# Altium PCB ADD.PcbDoc (part 3 of 3)
Units mm, origin at the board's own origin, x right, y up, seen from the top; angles counter-clockwise.
Board outline 193.67 x 275.84 mm, 2 copper layers (Top Layer, Bottom Layer); 216 components, 0 nets, 1200 pads, 0 vias.
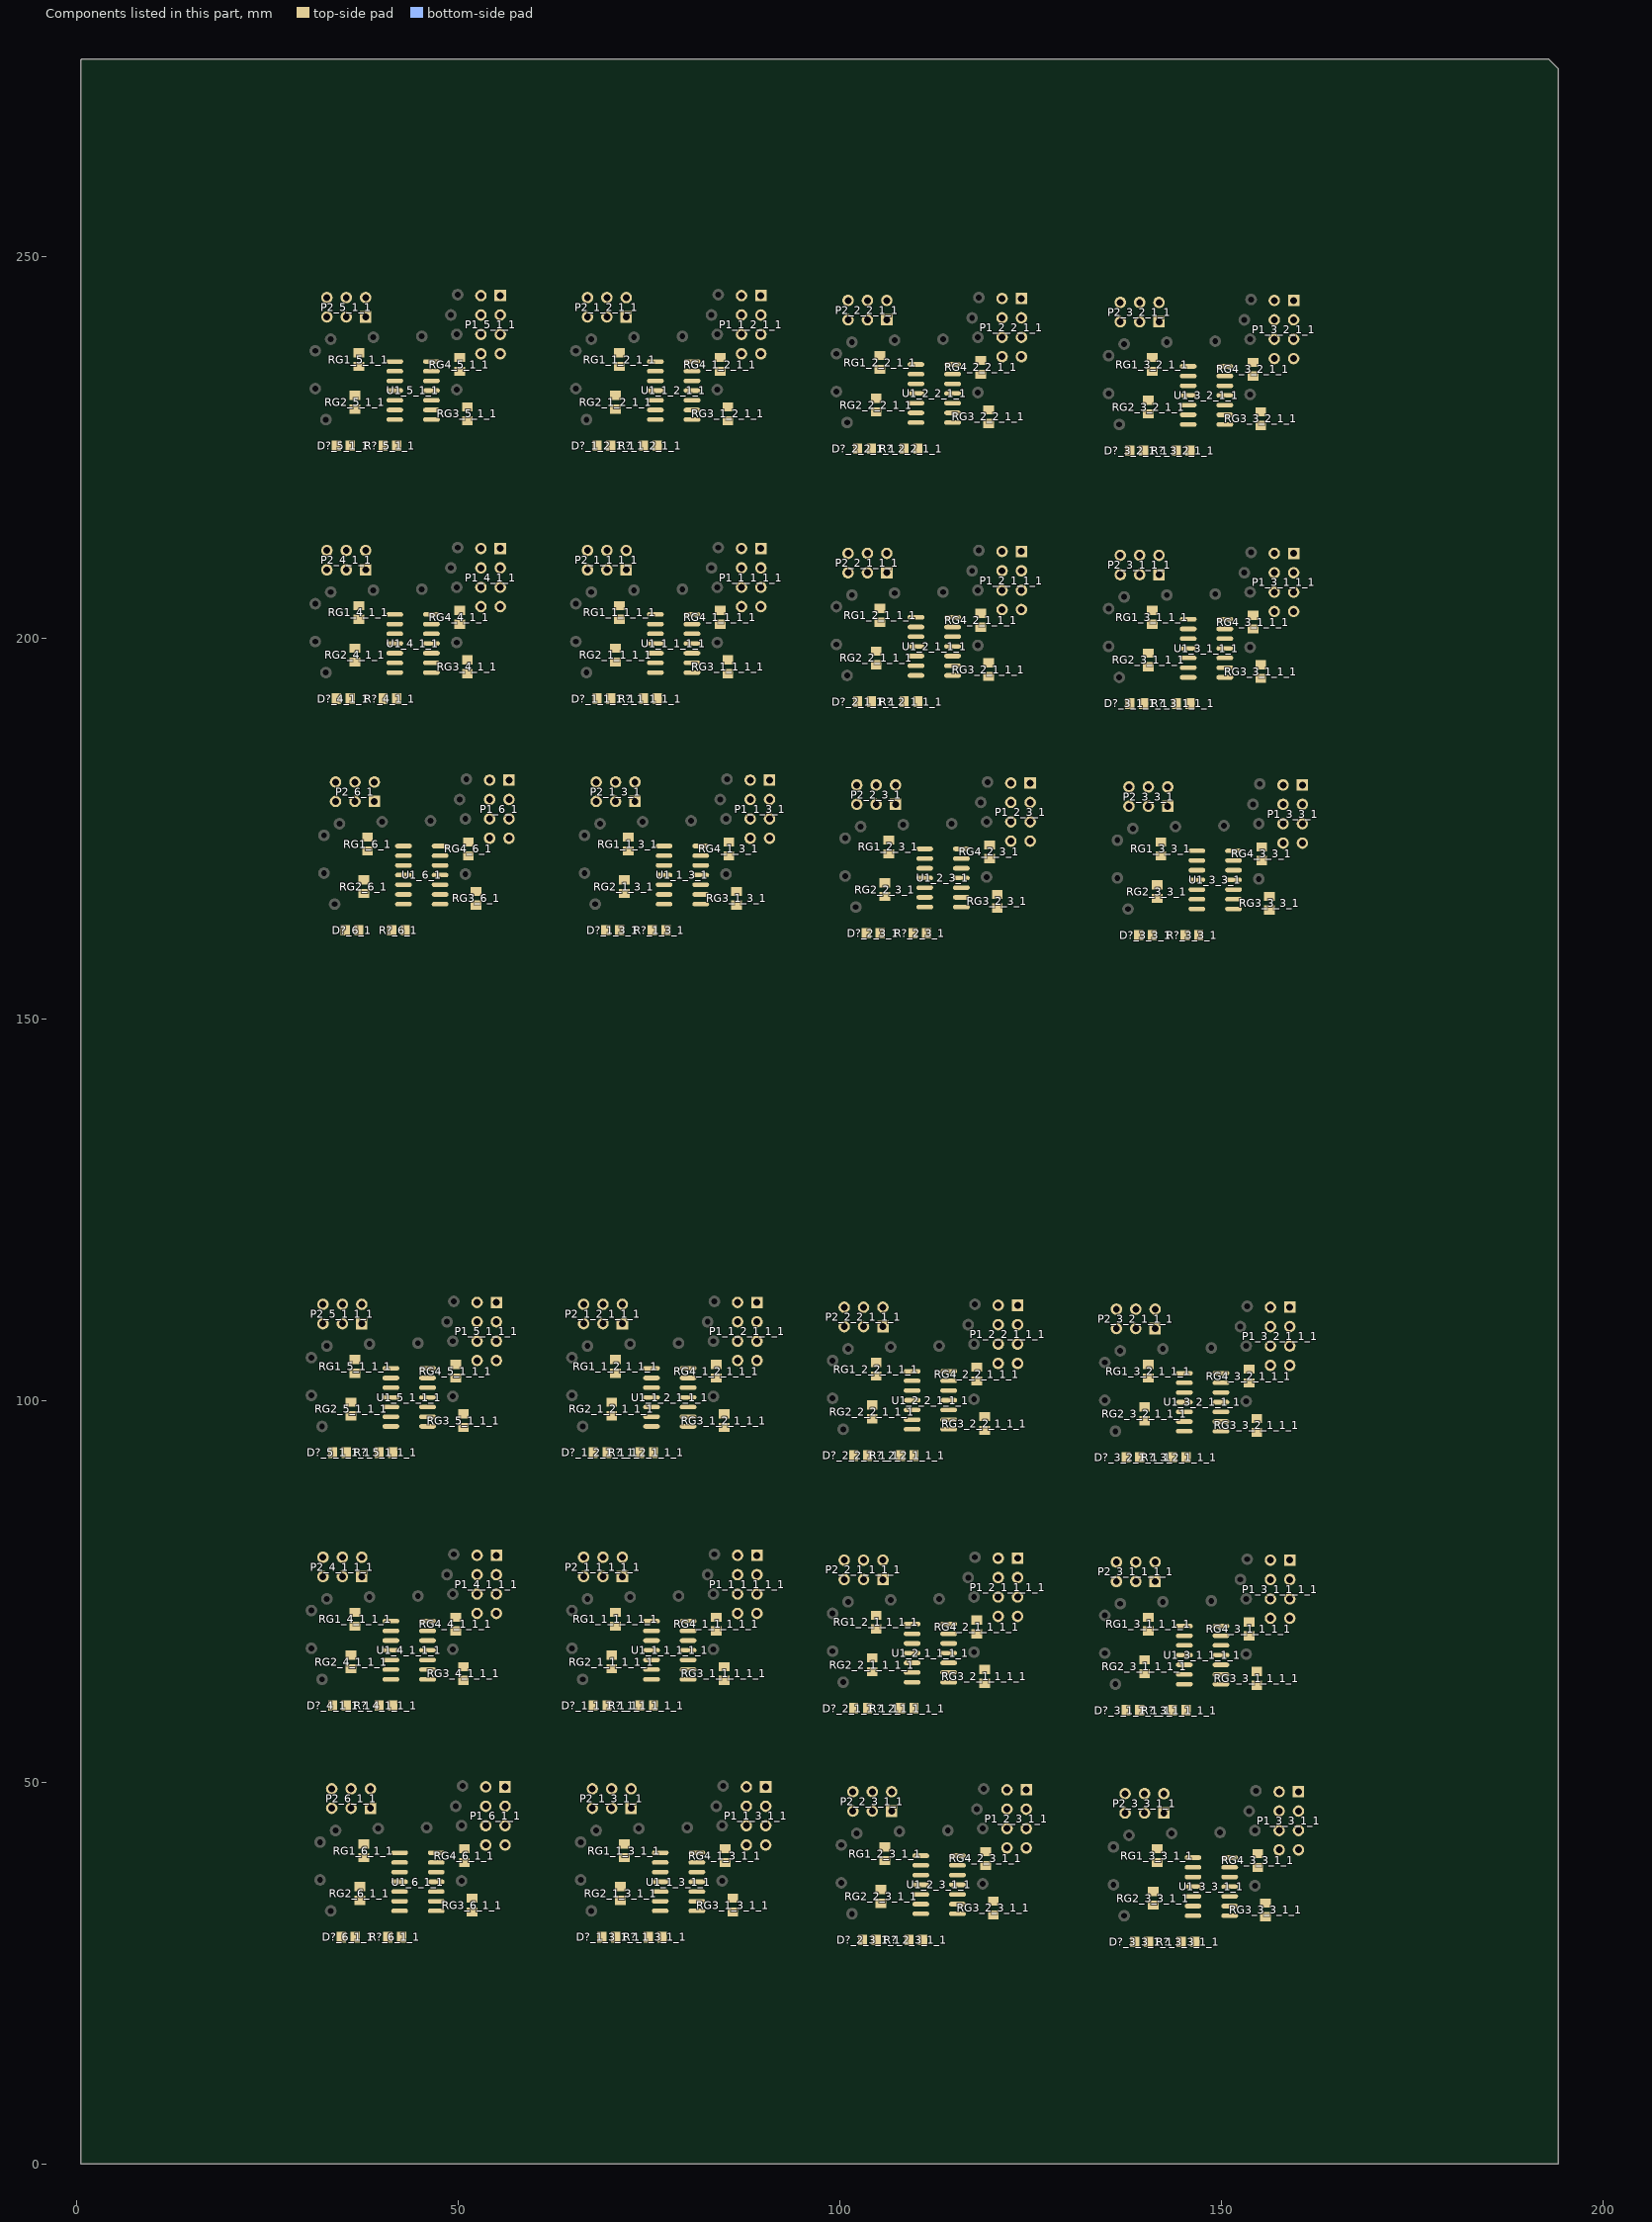
[diagram p3: the components of this part, seen from the top]

## Keep-outs
Keep-Out Layer:
  lines w0.254: 26.911,57.15 26.911,81.788 57.01,81.788 57.01,57.15 26.911,57.15 ; 26.911,90.297 26.911,114.935 57.01,114.935 57.01,90.297 26.911,90.297 ; 27.419,189.103 27.419,213.741 57.518,213.741 57.518,189.103 27.419,189.103 ; 27.419,222.25 27.419,246.888 57.518,246.888 57.518,222.25 27.419,222.25 ; 28.054,26.797 58.153,26.797 58.153,51.435 28.054,51.435 28.054,26.797 ; 28.562,158.75 58.661,158.75 58.661,183.388 28.562,183.388 28.562,158.75 ; 61.074,57.15 61.074,81.788 91.173,81.788 91.173,57.15 61.074,57.15 ; 61.074,90.297 61.074,114.935 91.173,114.935 91.173,90.297 61.074,90.297 ; 61.582,189.103 61.582,213.741 91.681,213.741 91.681,189.103 61.582,189.103 ; 61.582,222.25 61.582,246.888 91.681,246.888 91.681,222.25 61.582,222.25 ; 62.217,26.797 92.316,26.797 92.316,51.435 62.217,51.435 62.217,26.797 ; 62.725,158.75 92.824,158.75 92.824,183.388 62.725,183.388 62.725,158.75 ; 95.237,56.769 95.237,81.407 125.336,81.407 125.336,56.769 95.237,56.769 ; 95.237,89.916 95.237,114.554 125.336,114.554 125.336,89.916 95.237,89.916 ; 95.745,188.722 95.745,213.36 125.844,213.36 125.844,188.722 95.745,188.722 ; 95.745,221.869 95.745,246.507 125.844,246.507 125.844,221.869 95.745,221.869 ; 96.38,26.416 126.479,26.416 126.479,51.054 96.38,51.054 96.38,26.416 ; 96.888,158.369 126.987,158.369 126.987,183.007 96.888,183.007 96.888,158.369 ; 130.924,56.515 130.924,81.153 161.023,81.153 161.023,56.515 130.924,56.515 ; 130.924,89.662 130.924,114.3 161.023,114.3 161.023,89.662 130.924,89.662 ; 131.432,188.468 131.432,213.106 161.531,213.106 161.531,188.468 131.432,188.468 ; 131.432,221.615 131.432,246.253 161.531,246.253 161.531,221.615 131.432,221.615 ; 132.067,26.162 162.166,26.162 162.166,50.8 132.067,50.8 132.067,26.162 ; 132.575,158.115 162.674,158.115 162.674,182.753 132.575,182.753 132.575,158.115

## Other copper
Bottom Layer:
  text "ROBOT" at 44.31,235.458 h1.52
  text "ROBOT" at 78.473,235.458 h1.52
  text "ROBOT" at 112.636,235.077 h1.52
  text "ROBOT" at 148.323,234.823 h1.52
  text "Presure" at 45.707,232.791 h1.52
  text "Presure" at 79.87,232.791 h1.52
  text "Presure" at 114.033,232.41 h1.52
  text "Presure" at 149.72,232.156 h1.52
  text "collection" at 46.596,230.251 h1.52
  text "collection" at 80.759,230.251 h1.52
  text "collection" at 114.922,229.87 h1.52
  text "collection" at 150.609,229.616 h1.52
  text "2017.9.10" at 56.629,223.012 h1.52
  text "2017.9.10" at 90.792,223.012 h1.52
  text "2017.9.10" at 124.955,222.631 h1.52
  text "2017.9.10" at 160.642,222.377 h1.52
  text "ROBOT" at 44.31,202.311 h1.52
  text "ROBOT" at 78.473,202.311 h1.52
  text "ROBOT" at 112.636,201.93 h1.52
  text "ROBOT" at 148.323,201.676 h1.52
  text "Presure" at 45.707,199.644 h1.52
  text "Presure" at 79.87,199.644 h1.52
  text "Presure" at 114.033,199.263 h1.52
  text "Presure" at 149.72,199.009 h1.52
  text "collection" at 46.596,197.104 h1.52
  text "collection" at 80.759,197.104 h1.52
  text "collection" at 114.922,196.723 h1.52
  text "collection" at 150.609,196.469 h1.52
  text "2017.9.10" at 56.629,189.865 h1.52
  text "2017.9.10" at 90.792,189.865 h1.52
  text "2017.9.10" at 124.955,189.484 h1.52
  text "2017.9.10" at 160.642,189.23 h1.52
  text "ROBOT" at 45.453,171.958 h1.52
  text "ROBOT" at 79.616,171.958 h1.52
  text "ROBOT" at 113.779,171.577 h1.52
  text "ROBOT" at 149.466,171.323 h1.52
  text "Presure" at 46.85,169.291 h1.52
  text "Presure" at 81.013,169.291 h1.52
  text "Presure" at 115.176,168.91 h1.52
  text "Presure" at 150.863,168.656 h1.52
  text "collection" at 47.739,166.751 h1.52
  text "collection" at 81.902,166.751 h1.52
  text "collection" at 116.065,166.37 h1.52
  text "collection" at 151.752,166.116 h1.52
  text "2017.9.10" at 57.772,159.512 h1.52
  text "2017.9.10" at 91.935,159.512 h1.52
  text "2017.9.10" at 126.098,159.131 h1.52
  text "2017.9.10" at 161.785,158.877 h1.52
  text "ROBOT" at 43.802,103.505 h1.52
  text "ROBOT" at 77.965,103.505 h1.52
  text "ROBOT" at 112.128,103.124 h1.52
  text "ROBOT" at 147.815,102.87 h1.52
  text "Presure" at 45.199,100.838 h1.52
  text "Presure" at 79.362,100.838 h1.52
  text "Presure" at 113.525,100.457 h1.52
  text "Presure" at 149.212,100.203 h1.52
  text "collection" at 46.088,98.298 h1.52
  text "collection" at 80.251,98.298 h1.52
  text "collection" at 114.414,97.917 h1.52
  text "collection" at 150.101,97.663 h1.52
  text "2017.9.10" at 56.121,91.059 h1.52
  text "2017.9.10" at 90.284,91.059 h1.52
  text "2017.9.10" at 124.447,90.678 h1.52
  text "2017.9.10" at 160.134,90.424 h1.52
  text "ROBOT" at 43.802,70.358 h1.52
  text "ROBOT" at 77.965,70.358 h1.52
  text "ROBOT" at 112.128,69.977 h1.52
  text "ROBOT" at 147.815,69.723 h1.52
  text "Presure" at 45.199,67.691 h1.52
  text "Presure" at 79.362,67.691 h1.52
  text "Presure" at 113.525,67.31 h1.52
  text "Presure" at 149.212,67.056 h1.52
  text "collection" at 46.088,65.151 h1.52
  text "collection" at 80.251,65.151 h1.52
  text "collection" at 114.414,64.77 h1.52
  text "collection" at 150.101,64.516 h1.52
  text "2017.9.10" at 56.121,57.912 h1.52
  text "2017.9.10" at 90.284,57.912 h1.52
  text "2017.9.10" at 124.447,57.531 h1.52
  text "2017.9.10" at 160.134,57.277 h1.52
  text "ROBOT" at 44.945,40.005 h1.52
  text "ROBOT" at 79.108,40.005 h1.52
  text "ROBOT" at 113.271,39.624 h1.52
  text "ROBOT" at 148.958,39.37 h1.52
  text "Presure" at 46.342,37.338 h1.52
  text "Presure" at 80.505,37.338 h1.52
  text "Presure" at 114.668,36.957 h1.52
  text "Presure" at 150.355,36.703 h1.52
  text "collection" at 47.231,34.798 h1.52
  text "collection" at 81.394,34.798 h1.52
  text "collection" at 115.557,34.417 h1.52
  text "collection" at 151.244,34.163 h1.52
  text "2017.9.10" at 57.264,27.559 h1.52
  text "2017.9.10" at 91.427,27.559 h1.52
  text "2017.9.10" at 125.59,27.178 h1.52
  text "2017.9.10" at 161.277,26.924 h1.52

## Silkscreen, mask and mechanical layers (free items; w line width, h text height)
Drill Guide:
  lines w0.254: 9.385,10.414 189.09,10.414 189.09,128.905 183.756,134.239 17.767,134.239 5.321,121.793 5.321,14.478 9.639,10.16 ; 9.893,142.367 189.598,142.367 189.598,260.858 184.264,266.192 18.275,266.192 5.829,253.746 5.829,146.431 10.147,142.113

## Text inside footprints (layer, text, board x,y; h text height)
P1_1_1_1_1: Bottom Overlay "2" at 87.617,214.249 h1.27 r90; Bottom Overlay "1" at 90.157,213.741 h1.27 r90; Bottom Overlay "7" at 90.157,202.565 h1.27 r90; Bottom Overlay "8" at 87.617,202.565 h1.27 r90
P1_1_1_1_1_1: Bottom Overlay "2" at 87.109,82.296 h1.27 r90; Bottom Overlay "1" at 89.649,81.788 h1.27 r90; Bottom Overlay "7" at 89.649,70.612 h1.27 r90; Bottom Overlay "8" at 87.109,70.612 h1.27 r90
P1_1_2_1_1: Bottom Overlay "2" at 87.617,247.396 h1.27 r90; Bottom Overlay "1" at 90.157,246.888 h1.27 r90; Bottom Overlay "7" at 90.157,235.712 h1.27 r90; Bottom Overlay "8" at 87.617,235.712 h1.27 r90
P1_1_2_1_1_1: Bottom Overlay "2" at 87.109,115.443 h1.27 r90; Bottom Overlay "1" at 89.649,114.935 h1.27 r90; Bottom Overlay "7" at 89.649,103.759 h1.27 r90; Bottom Overlay "8" at 87.109,103.759 h1.27 r90
P1_1_3_1: Bottom Overlay "2" at 88.76,183.896 h1.27 r90; Bottom Overlay "1" at 91.3,183.388 h1.27 r90; Bottom Overlay "7" at 91.3,172.212 h1.27 r90; Bottom Overlay "8" at 88.76,172.212 h1.27 r90
P1_1_3_1_1: Bottom Overlay "2" at 88.252,51.943 h1.27 r90; Bottom Overlay "1" at 90.792,51.435 h1.27 r90; Bottom Overlay "7" at 90.792,40.259 h1.27 r90; Bottom Overlay "8" at 88.252,40.259 h1.27 r90
P1_2_1_1_1: Bottom Overlay "2" at 121.78,213.868 h1.27 r90; Bottom Overlay "1" at 124.32,213.36 h1.27 r90; Bottom Overlay "7" at 124.32,202.184 h1.27 r90; Bottom Overlay "8" at 121.78,202.184 h1.27 r90
P1_2_1_1_1_1: Bottom Overlay "2" at 121.272,81.915 h1.27 r90; Bottom Overlay "1" at 123.812,81.407 h1.27 r90; Bottom Overlay "7" at 123.812,70.231 h1.27 r90; Bottom Overlay "8" at 121.272,70.231 h1.27 r90
P1_2_2_1_1: Bottom Overlay "2" at 121.78,247.015 h1.27 r90; Bottom Overlay "1" at 124.32,246.507 h1.27 r90; Bottom Overlay "7" at 124.32,235.331 h1.27 r90; Bottom Overlay "8" at 121.78,235.331 h1.27 r90
P1_2_2_1_1_1: Bottom Overlay "2" at 121.272,115.062 h1.27 r90; Bottom Overlay "1" at 123.812,114.554 h1.27 r90; Bottom Overlay "7" at 123.812,103.378 h1.27 r90; Bottom Overlay "8" at 121.272,103.378 h1.27 r90
P1_2_3_1: Bottom Overlay "2" at 122.923,183.515 h1.27 r90; Bottom Overlay "1" at 125.463,183.007 h1.27 r90; Bottom Overlay "7" at 125.463,171.831 h1.27 r90; Bottom Overlay "8" at 122.923,171.831 h1.27 r90
P1_2_3_1_1: Bottom Overlay "2" at 122.415,51.562 h1.27 r90; Bottom Overlay "1" at 124.955,51.054 h1.27 r90; Bottom Overlay "7" at 124.955,39.878 h1.27 r90; Bottom Overlay "8" at 122.415,39.878 h1.27 r90
P1_3_1_1_1: Bottom Overlay "2" at 157.467,213.614 h1.27 r90; Bottom Overlay "1" at 160.007,213.106 h1.27 r90; Bottom Overlay "7" at 160.007,201.93 h1.27 r90; Bottom Overlay "8" at 157.467,201.93 h1.27 r90
P1_3_1_1_1_1: Bottom Overlay "2" at 156.959,81.661 h1.27 r90; Bottom Overlay "1" at 159.499,81.153 h1.27 r90; Bottom Overlay "7" at 159.499,69.977 h1.27 r90; Bottom Overlay "8" at 156.959,69.977 h1.27 r90
P1_3_2_1_1: Bottom Overlay "2" at 157.467,246.761 h1.27 r90; Bottom Overlay "1" at 160.007,246.253 h1.27 r90; Bottom Overlay "7" at 160.007,235.077 h1.27 r90; Bottom Overlay "8" at 157.467,235.077 h1.27 r90
P1_3_2_1_1_1: Bottom Overlay "2" at 156.959,114.808 h1.27 r90; Bottom Overlay "1" at 159.499,114.3 h1.27 r90; Bottom Overlay "7" at 159.499,103.124 h1.27 r90; Bottom Overlay "8" at 156.959,103.124 h1.27 r90
P1_3_3_1: Bottom Overlay "2" at 158.61,183.261 h1.27 r90; Bottom Overlay "1" at 161.15,182.753 h1.27 r90; Bottom Overlay "7" at 161.15,171.577 h1.27 r90; Bottom Overlay "8" at 158.61,171.577 h1.27 r90
P1_3_3_1_1: Bottom Overlay "2" at 158.102,51.308 h1.27 r90; Bottom Overlay "1" at 160.642,50.8 h1.27 r90; Bottom Overlay "7" at 160.642,39.624 h1.27 r90; Bottom Overlay "8" at 158.102,39.624 h1.27 r90
P1_4_1_1: Bottom Overlay "2" at 53.454,214.249 h1.27 r90; Bottom Overlay "1" at 55.994,213.741 h1.27 r90; Bottom Overlay "7" at 55.994,202.565 h1.27 r90; Bottom Overlay "8" at 53.454,202.565 h1.27 r90
P1_4_1_1_1: Bottom Overlay "2" at 52.946,82.296 h1.27 r90; Bottom Overlay "1" at 55.486,81.788 h1.27 r90; Bottom Overlay "7" at 55.486,70.612 h1.27 r90; Bottom Overlay "8" at 52.946,70.612 h1.27 r90
P1_5_1_1: Bottom Overlay "2" at 53.454,247.396 h1.27 r90; Bottom Overlay "1" at 55.994,246.888 h1.27 r90; Bottom Overlay "7" at 55.994,235.712 h1.27 r90; Bottom Overlay "8" at 53.454,235.712 h1.27 r90
P1_5_1_1_1: Bottom Overlay "2" at 52.946,115.443 h1.27 r90; Bottom Overlay "1" at 55.486,114.935 h1.27 r90; Bottom Overlay "7" at 55.486,103.759 h1.27 r90; Bottom Overlay "8" at 52.946,103.759 h1.27 r90
P1_6_1: Bottom Overlay "2" at 54.597,183.896 h1.27 r90; Bottom Overlay "1" at 57.137,183.388 h1.27 r90; Bottom Overlay "7" at 57.137,172.212 h1.27 r90; Bottom Overlay "8" at 54.597,172.212 h1.27 r90
P1_6_1_1: Bottom Overlay "2" at 54.089,51.943 h1.27 r90; Bottom Overlay "1" at 56.629,51.435 h1.27 r90; Bottom Overlay "7" at 56.629,40.259 h1.27 r90; Bottom Overlay "8" at 54.089,40.259 h1.27 r90
P2_1_1_1_1: Bottom Overlay "6" at 65.392,210.947 h1.27; Bottom Overlay "5" at 65.392,208.407 h1.27; Bottom Overlay "2" at 74.536,210.947 h1.27; Bottom Overlay "1" at 74.028,208.407 h1.27
P2_1_1_1_1_1: Bottom Overlay "6" at 64.884,78.994 h1.27; Bottom Overlay "5" at 64.884,76.454 h1.27; Bottom Overlay "2" at 74.028,78.994 h1.27; Bottom Overlay "1" at 73.52,76.454 h1.27
P2_1_2_1_1: Bottom Overlay "6" at 65.392,244.094 h1.27; Bottom Overlay "5" at 65.392,241.554 h1.27; Bottom Overlay "2" at 74.536,244.094 h1.27; Bottom Overlay "1" at 74.028,241.554 h1.27
P2_1_2_1_1_1: Bottom Overlay "6" at 64.884,112.141 h1.27; Bottom Overlay "5" at 64.884,109.601 h1.27; Bottom Overlay "2" at 74.028,112.141 h1.27; Bottom Overlay "1" at 73.52,109.601 h1.27
P2_1_3_1: Bottom Overlay "6" at 66.535,180.594 h1.27; Bottom Overlay "5" at 66.535,178.054 h1.27; Bottom Overlay "2" at 75.679,180.594 h1.27; Bottom Overlay "1" at 75.171,178.054 h1.27
P2_1_3_1_1: Bottom Overlay "6" at 66.027,48.641 h1.27; Bottom Overlay "5" at 66.027,46.101 h1.27; Bottom Overlay "2" at 75.171,48.641 h1.27; Bottom Overlay "1" at 74.663,46.101 h1.27
P2_2_1_1_1: Bottom Overlay "6" at 99.555,210.566 h1.27; Bottom Overlay "5" at 99.555,208.026 h1.27; Bottom Overlay "2" at 108.699,210.566 h1.27; Bottom Overlay "1" at 108.191,208.026 h1.27
P2_2_1_1_1_1: Bottom Overlay "6" at 99.047,78.613 h1.27; Bottom Overlay "5" at 99.047,76.073 h1.27; Bottom Overlay "2" at 108.191,78.613 h1.27; Bottom Overlay "1" at 107.683,76.073 h1.27
P2_2_2_1_1: Bottom Overlay "6" at 99.555,243.713 h1.27; Bottom Overlay "5" at 99.555,241.173 h1.27; Bottom Overlay "2" at 108.699,243.713 h1.27; Bottom Overlay "1" at 108.191,241.173 h1.27
P2_2_2_1_1_1: Bottom Overlay "6" at 99.047,111.76 h1.27; Bottom Overlay "5" at 99.047,109.22 h1.27; Bottom Overlay "2" at 108.191,111.76 h1.27; Bottom Overlay "1" at 107.683,109.22 h1.27
P2_2_3_1: Bottom Overlay "6" at 100.698,180.213 h1.27; Bottom Overlay "5" at 100.698,177.673 h1.27; Bottom Overlay "2" at 109.842,180.213 h1.27; Bottom Overlay "1" at 109.334,177.673 h1.27
P2_2_3_1_1: Bottom Overlay "6" at 100.19,48.26 h1.27; Bottom Overlay "5" at 100.19,45.72 h1.27; Bottom Overlay "2" at 109.334,48.26 h1.27; Bottom Overlay "1" at 108.826,45.72 h1.27
P2_3_1_1_1: Bottom Overlay "6" at 135.242,210.312 h1.27; Bottom Overlay "5" at 135.242,207.772 h1.27; Bottom Overlay "2" at 144.386,210.312 h1.27; Bottom Overlay "1" at 143.878,207.772 h1.27
P2_3_1_1_1_1: Bottom Overlay "6" at 134.734,78.359 h1.27; Bottom Overlay "5" at 134.734,75.819 h1.27; Bottom Overlay "2" at 143.878,78.359 h1.27; Bottom Overlay "1" at 143.37,75.819 h1.27
P2_3_2_1_1: Bottom Overlay "6" at 135.242,243.459 h1.27; Bottom Overlay "5" at 135.242,240.919 h1.27; Bottom Overlay "2" at 144.386,243.459 h1.27; Bottom Overlay "1" at 143.878,240.919 h1.27
P2_3_2_1_1_1: Bottom Overlay "6" at 134.734,111.506 h1.27; Bottom Overlay "5" at 134.734,108.966 h1.27; Bottom Overlay "2" at 143.878,111.506 h1.27; Bottom Overlay "1" at 143.37,108.966 h1.27
P2_3_3_1: Bottom Overlay "6" at 136.385,179.959 h1.27; Bottom Overlay "5" at 136.385,177.419 h1.27; Bottom Overlay "2" at 145.529,179.959 h1.27; Bottom Overlay "1" at 145.021,177.419 h1.27
P2_3_3_1_1: Bottom Overlay "6" at 135.877,48.006 h1.27; Bottom Overlay "5" at 135.877,45.466 h1.27; Bottom Overlay "2" at 145.021,48.006 h1.27; Bottom Overlay "1" at 144.513,45.466 h1.27
P2_4_1_1: Bottom Overlay "6" at 31.229,210.947 h1.27; Bottom Overlay "5" at 31.229,208.407 h1.27; Bottom Overlay "2" at 40.373,210.947 h1.27; Bottom Overlay "1" at 39.865,208.407 h1.27
P2_4_1_1_1: Bottom Overlay "6" at 30.721,78.994 h1.27; Bottom Overlay "5" at 30.721,76.454 h1.27; Bottom Overlay "2" at 39.865,78.994 h1.27; Bottom Overlay "1" at 39.357,76.454 h1.27
P2_5_1_1: Bottom Overlay "6" at 31.229,244.094 h1.27; Bottom Overlay "5" at 31.229,241.554 h1.27; Bottom Overlay "2" at 40.373,244.094 h1.27; Bottom Overlay "1" at 39.865,241.554 h1.27
P2_5_1_1_1: Bottom Overlay "6" at 30.721,112.141 h1.27; Bottom Overlay "5" at 30.721,109.601 h1.27; Bottom Overlay "2" at 39.865,112.141 h1.27; Bottom Overlay "1" at 39.357,109.601 h1.27
P2_6_1: Bottom Overlay "6" at 32.372,180.594 h1.27; Bottom Overlay "5" at 32.372,178.054 h1.27; Bottom Overlay "2" at 41.516,180.594 h1.27; Bottom Overlay "1" at 41.008,178.054 h1.27
P2_6_1_1: Bottom Overlay "6" at 31.864,48.641 h1.27; Bottom Overlay "5" at 31.864,46.101 h1.27; Bottom Overlay "2" at 41.008,48.641 h1.27; Bottom Overlay "1" at 40.5,46.101 h1.27